# EAGLE board Zio Qwiic Eink Display 2.9 (EAGLE 9.1.0)
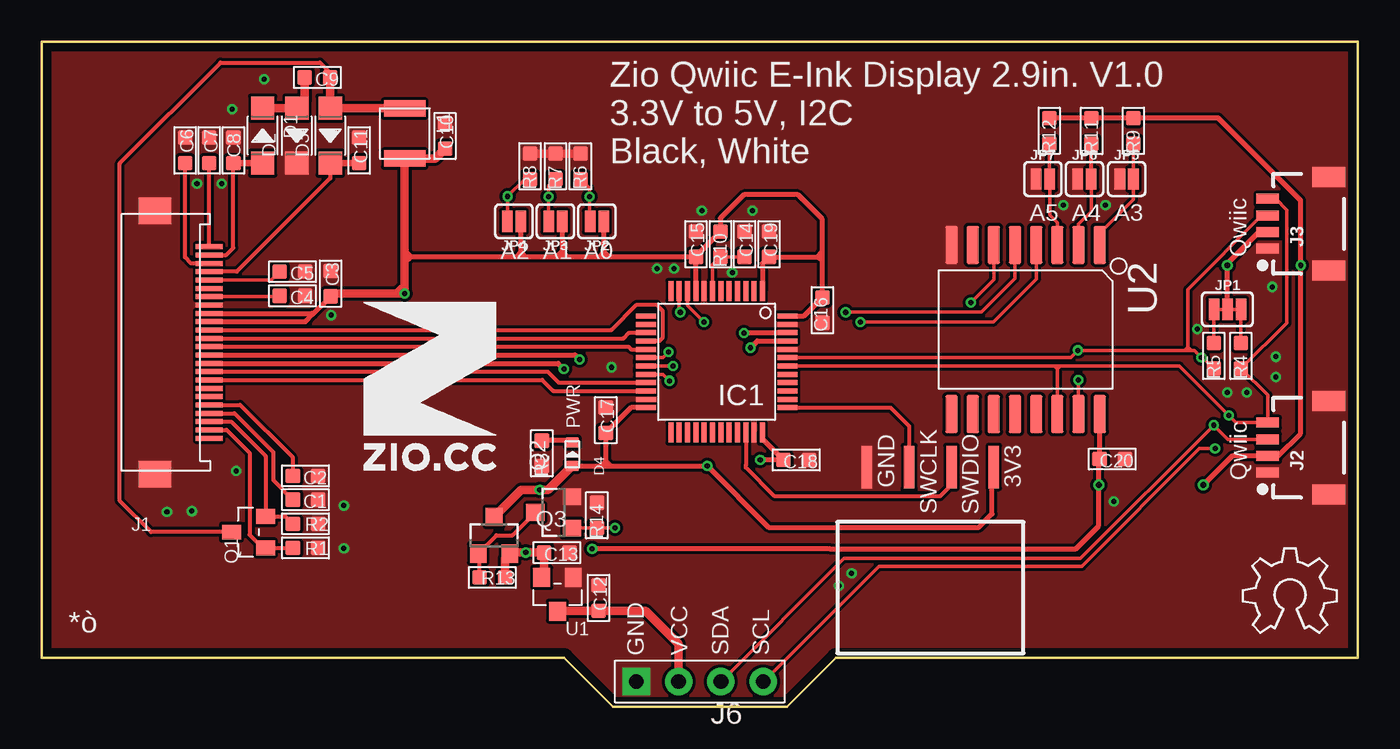
[diagram p0: board, top side]
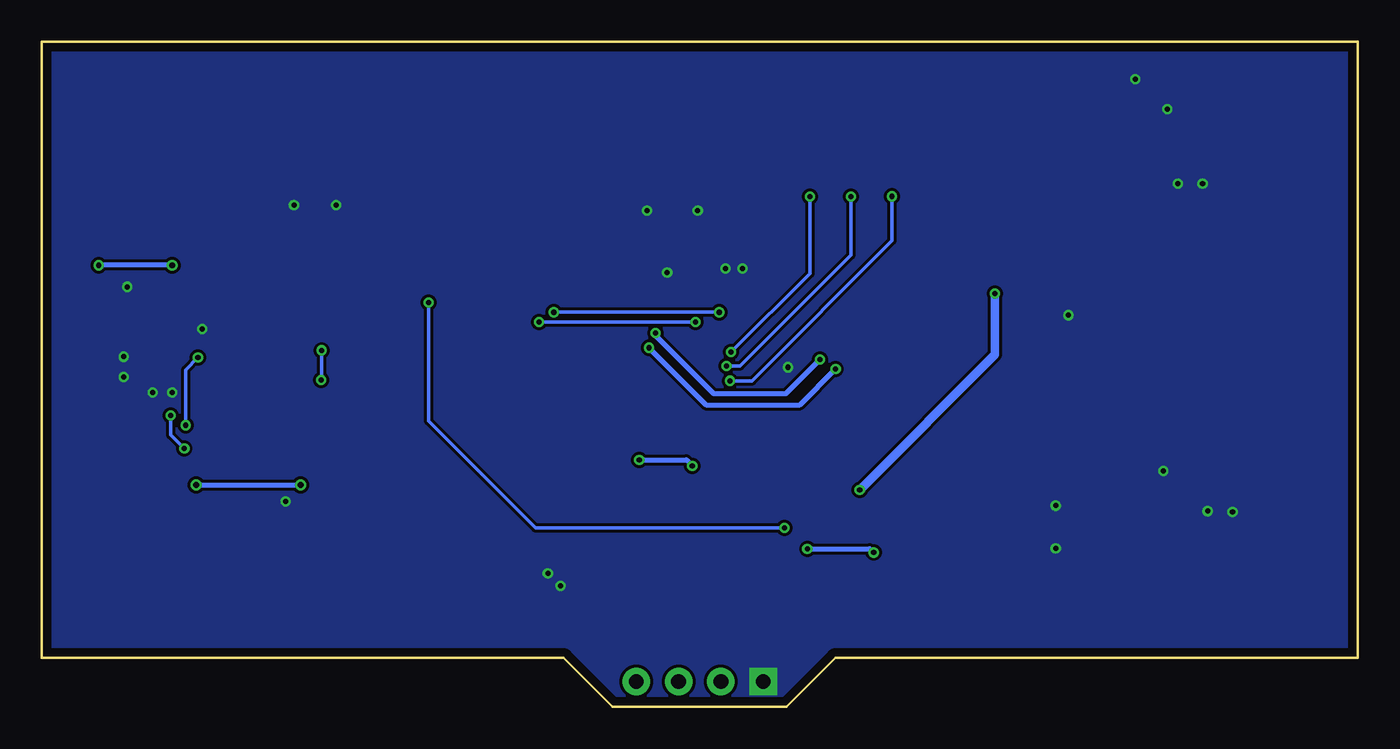
[diagram p1: board, bottom side, seen from below]

Size 79 x 39.95 mm. Coordinates in mm from the lower left corner, seen from the top.
Outline: 0,2.95 31.37,2.95 34.29,0 44.74,0 47.68,2.95 79,2.95 79,39.95 0,39.95 0,2.95
Copper layers (1*16): Top 0.035mm / dielectric 1.5mm / Bottom 0.035mm
Design rules "NOA Eagle Rule": minimum track width 7mil, minimum drill 12mil, track to track 7mil, track to pad 7mil, pad to pad 7mil, via to via 7mil, smd to smd 0mil, copper to edge 20mil, drill to drill 10mil, minimum pad ring 10mil, minimum via ring 6mil, stop-mask expansion 2mil, vias tented up to drill 25mil, thermal gap 10mil

## Footprints (pad centres in the part's own frame; a part is rotated, then mirrored left to right if it is on the bottom)
C0603 = smd 0.889 x 0.889: 1 -0.762,0; 2 0.762,0
0603 = smd 0.889 x 0.889: 1 -0.762,0; 2 0.762,0
SOD123 = smd 1.397 x 1.397: + 1.651,0; - -1.651,0
LED-0603 = smd 0.635 x 0.8: + 0.699,0; - -0.699,0
LQFP48 = smd 0.3 x 1.2: 1 -2.75,-4.25; 2 -2.25,-4.25; 3 -1.75,-4.25; 4 -1.25,-4.25; 5 -0.75,-4.25; 6 -0.25,-4.25; 7 0.25,-4.25; 8 0.75,-4.25; 9 1.25,-4.25; 10 1.75,-4.25; 11 2.25,-4.25; 12 2.75,-4.25; 25 2.75,4.25; 26 2.25,4.25; 27 1.75,4.25; 28 1.25,4.25; 29 0.75,4.25; 30 0.25,4.25; 31 -0.25,4.25; 32 -0.75,4.25; 33 -1.25,4.25; 34 -1.75,4.25; 35 -2.25,4.25; 36 -2.75,4.25 | smd 1.2 x 0.3: 13 4.25,-2.75; 14 4.25,-2.25; 15 4.25,-1.75; 16 4.25,-1.25; 17 4.25,-0.75; 18 4.25,-0.25; 19 4.25,0.25; 20 4.25,0.75; 21 4.25,1.25; 22 4.25,1.75; 23 4.25,2.25; 24 4.25,2.75; 37 -4.25,2.75; 38 -4.25,2.25; 39 -4.25,1.75; 40 -4.25,1.25; 41 -4.25,0.75; 42 -4.25,0.25; 43 -4.25,-0.25; 44 -4.25,-0.75; 45 -4.25,-1.25; 46 -4.25,-1.75; 47 -4.25,-2.25; 48 -4.25,-2.75
FPC-0.5-24P_UP = smd 0.3 x 1.6: 1 -5.75,-0.05; 2 -5.25,-0.05; 3 -4.75,-0.05; 4 -4.25,-0.05; 5 -3.75,-0.05; 6 -3.25,-0.05; 7 -2.75,-0.05; 8 -2.25,-0.05; 9 -1.75,-0.05; 10 -1.25,-0.05; 11 -0.75,-0.05; 12 -0.25,-0.05; 13 0.25,-0.05; 14 0.75,-0.05; 15 1.25,-0.05; 16 1.75,-0.05; 17 2.25,-0.05; 18 2.75,-0.05; 19 3.25,-0.05; 20 3.75,-0.05; 21 4.25,-0.05; 22 4.75,-0.05; 23 5.25,-0.05; 24 5.75,-0.05 | smd 1.6 x 1.95: 25 7.9,3.2; 26 -7.9,3.2
JST-SH-4P = smd 0.6 x 1.35: 1 1.5,0; 2 0.5,0; 3 -0.5,0; 4 -1.5,0 | smd 1.2 x 2: NC1 -2.8,3.675; NC2 2.8,3.675
4P-2.54-SMD-180 = smd 2.54 x 0.635: 1 0,3.86; 2 0,1.32; 3 0,-1.22; 4 0,-3.76
4P-65/35MIL = drill 0.889 pad 1.651 square: 1 0,3.81 | drill 0.889 pad 1.651: 2 0,1.27; 3 0,-1.27; 4 0,-3.81
SMT-JUMPER_3_2-NC_TRACE = smd 0.635 x 1.27: 1 -0.813,0; 2 0,0; 3 0.813,0
SMT-JUMPER_2_NC_PASTE_SILK_NOCREM = smd 0.635 x 1.27: 1 -0.406,0; 2 0.406,0
L3012 = smd 1 x 2.5: 1 -1.5,0; 2 1.5,0
SOT23 = smd 0.889 x 1.143: 1 -0.95,-1.016; 2 0.95,-1.016; 3 0,1.016
SOT23' = smd 1 x 1.1: 1 -0.95,-1.1; 2 0.95,-1.1; 3 0,1.1
R0603 = smd 0.889 x 0.889: 1 -0.762,0; 2 0.762,0
SOT23'' = smd 1.143 x 1.016: 1 1.016,-0.95; 2 1.016,0.95; 3 -1.016,0
SO16-W = smd 0.762 x 2.286: 1 -4.445,-5.08; 2 -3.175,-5.08; 3 -1.905,-5.08; 4 -0.635,-5.08; 5 0.635,-5.08; 6 1.905,-5.08; 7 3.175,-5.08; 8 4.445,-5.08; 9 4.445,5.08; 10 3.175,5.08; 11 1.905,5.08; 12 0.635,5.08; 13 -0.635,5.08; 14 -1.905,5.08; 15 -3.175,5.08; 16 -4.445,5.08

## Placement (x,y rotation side)
C1  1uF ±10% 25V  [C0603]  15.84,12.44 180 top
C2  1uF ±10% 25V  [C0603]  15.84,13.87 180 top
C3  1uF ±10% 10V  [C0603]  17.35,25.42 270 top
C4  1uF ±10% 25V  [C0603]  15.05,24.69 180 top
C5  1uF ±10% 25V  [C0603]  15.05,26.14 180 top
C6  1uF ±10% 25V  [C0603]  8.61,33.42 270 top
C7  1uF ±10% 25V  [C0603]  10.06,33.42 270 top
C8  1uF ±10% 50V  [0603]  11.51,33.42 270 top
C9  1uF ±10% 50V  [C0603]  16.55,37.79 180 top
C10  4.7uF ±10% 6.3V  [C0603]  24.21,34.28 270 top
C11  1uF ±10% 50V  [C0603]  19.05,33.42 270 top
C12  1uF ±10% 10V  [C0603]  33.43,6.54 270 top
C13  1uF ±10% 6.3V  [C0603]  30.93,9.27 180 top
C14  1uF ±10% 6.3V  [C0603]  42.19,27.79 270 top
C15  4.7uF ±10% 6.3V  [C0603]  39.27,27.79 270 top
C16  1uF ±10% 6.3V  [C0603]  46.86,23.83 90 top
C17  100nF ±10% 50V  [C0603]  33.86,17.22 270 top
C18  100nF ±10% 50V  [C0603]  45.29,14.83 180 top
C19  100nF ±10% 50V  [C0603]  43.66,27.79 270 top
C20  100nF ±10% 50V  [C0603]  64.26,14.88 180 top
D1  MBR0530  [SOD123]  13.26,34.31 270 top
D2  MBR0530  [SOD123]  15.31,34.3 90 top
D3  MBR0530  [SOD123]  17.32,34.3 90 top
D4  RLED  [LED-0603]  31.85,15.18 270 top
IC1  STM32F103C8T  [LQFP48]  40.51,20.73 180 top
J1  FPC-0.5-24P-UP  [FPC-0.5-24P_UP]  10,21.89 90 top
J2  JST-SH-4P-1.0  [JST-SH-4P]  73.58,15.57 270 top
J3  JST-SH-4P-1.0  [JST-SH-4P]  73.58,29.01 270 top
J4  [4P-2.54-SMD-180]  53.29,14.4 270 top
J6  [4P-65/35MIL]  39.5,1.52 90 top
JP1  SMT-JUMPER_3_2-NC_TRACE  [SMT-JUMPER_3_2-NC_TRACE]  71.17,23.88 0 top
JP2  JUMPER-SMT_2_NC_PASTE_NOCREM  [SMT-JUMPER_2_NC_PASTE_SILK_NOCREM]  33.32,29.16 180 top
JP3  JUMPER-SMT_2_NC_PASTE_NOCREM  [SMT-JUMPER_2_NC_PASTE_SILK_NOCREM]  30.84,29.16 180 top
JP4  JUMPER-SMT_2_NC_PASTE_NOCREM  [SMT-JUMPER_2_NC_PASTE_SILK_NOCREM]  28.35,29.16 180 top
JP5  JUMPER-SMT_2_NC_PASTE_NOCREM  [SMT-JUMPER_2_NC_PASTE_SILK_NOCREM]  65.12,31.7 0 top
JP6  JUMPER-SMT_2_NC_PASTE_NOCREM  [SMT-JUMPER_2_NC_PASTE_SILK_NOCREM]  62.6,31.7 0 top
JP7  JUMPER-SMT_2_NC_PASTE_NOCREM  [SMT-JUMPER_2_NC_PASTE_SILK_NOCREM]  60.1,31.7 0 top
L1  68uH 1A  [L3012]  21.79,34.43 90 top
Q1  2N7002  [SOT23]  12.42,10.5 90 top
Q2  2N7002  [SOT23']  30.73,11.68 90 top
Q3  CJ2301  [SOT23']  27.15,10.31 0 top
R1  10K ±1%  [R0603]  15.84,9.55 180 top
R2  3R ±1%  [R0603]  15.84,11 180 top
R3  1K ±1%  [R0603]  30.02,15.22 90 top
R4  4.7K ±1%  [R0603]  71.98,21.08 90 top
R5  4.7K ±1%  [R0603]  70.36,21.08 90 top
R6  10K ±1%  [R0603]  32.33,32.46 90 top
R7  10K ±1%  [R0603]  30.84,32.46 90 top
R8  10K ±1%  [R0603]  29.31,32.46 90 top
R9  10K ±1%  [R0603]  65.53,34.59 90 top
R10  10K ±1%  [R0603]  40.74,27.79 90 top
R11  10K ±1%  [R0603]  63.02,34.58 90 top
R12  10K ±1%  [R0603]  60.48,34.59 90 top
R13  100K ±1%  [R0603]  27.05,7.77 180 top
R14  100K ±1%  [R0603]  33.32,11.51 90 top
U1  XC6206P332MR  [SOT23'']  30.96,6.77 90 top
U2  PCF8574T  [SO16-W]  59.06,22.66 180 top
U$10  [OSHW_6X200_NOTEXT]  72.09,4.45 0 top
U$20  [10MM]  19.3,14.22 0 top

## Library data of the parts
C1-C7 C9-C20 L1 R1-R14 = RCL
C8 Q1 = Discretex
D1-D4 Q2 Q3 = Discrete_NOA
IC1 = micro-stm_v3
J1-J4 = Connector
J6 = Connector_NOA
JP1-JP7 = NOA-Jumpers
U1 = IC_NOA
U2 = IC
U$10 = Logo_OSHW
U$20 = ZIO_silkscreen_package

## Nets
+3V3: C3.2 C10.2 C15.2 C16.2 C17.2 C18.2 C19.2 D4.+ IC1.1 IC1.9 IC1.24 IC1.36 IC1.48 J1.15 J1.16 J4.1 JP2.1 JP3.1 JP4.1 L1.1 Q3.3 R10.2
+VDD: C4.2 J1.18
A0: IC1.18 JP2.2 R6.1
A1: IC1.19 JP3.2 R7.1
A2: IC1.20 JP4.2 R8.1
A3: JP5.2 R9.1 U2.1
A4: JP6.2 R11.1 U2.2
A5: JP7.2 R12.1 U2.3
BS: IC1.22 J1.8
BUSY: IC1.21 J1.9
CS: IC1.17 J1.12
D/C: IC1.46 J1.11
GDR: J1.2 Q1.1 R1.2
GND: C1.1 C2.1 C3.1 C4.1 C5.1 C6.1 C7.1 C8.1 C10.1 C11.1 C12.1 C13.1 C14.1 C15.1 C16.1 C17.1 C18.1 C19.1 C20.1 D2.- IC1.8 IC1.23 IC1.35 IC1.44 IC1.47 J1.17 J1.25 J1.26 J2.1 J2.NC1 J2.NC2 J3.1 J3.NC1 J3.NC2 J4.4 J6.1 JP5.1 JP6.1 JP7.1 Q2.2 R1.1 R2.1 R3.1 R6.2 R7.2 R8.2 R14.2 U1.1 U2.8
MOSI: IC1.16 J1.14
N$1: IC1.31
N$2: C9.2 D1.- D2.+
N$3: C9.1 D3.+ L1.2 Q1.3
N$4: IC1.30
N$5: C14.2 IC1.7 R10.1
N$6: JP1.3 R4.2
N$7: D4.- R3.2
N$8: JP1.1 R5.2
N$9: Q2.3 Q3.1 R13.2
NC: J1.1
P0: IC1.10 U2.4
P1: IC1.11 U2.5
P2: Q2.1 R14.1 U2.6
PREVGH: C11.2 D3.- J1.21
PREVGL: C8.2 D1.+ J1.23
RES: IC1.45 J1.10
RESE: J1.3 Q1.2 R2.2
SCK: IC1.15 J1.13
SCL: IC1.42 J2.4 J3.4 J6.4 R4.1 U2.14
SDA: IC1.43 J2.3 J3.3 J6.3 R5.1 U2.15
SWCLK: IC1.37 J4.3
SWDIO: IC1.34 J4.2
TSCL: J1.6
TSDA: J1.7
VCC: C12.2 J6.2 U1.3
VCOM: C7.2 J1.24
VDD: C13.2 C20.2 J2.2 J3.2 JP1.2 Q3.2 R9.2 R11.2 R12.2 R13.1 U1.2 U2.16
VGH: C2.2 J1.5
VGL: C1.2 J1.4
VPP: J1.19
VSH: C5.2 J1.20
VSL: C6.2 J1.22

## Tracks (layer width: path | path; a pad name or v marks a point on that pad's centre or on a via)
+3V3  (via drill 0.3)
  Top 0.305: J1.16 16.22,23.64 16.27,23.58 | J1.15 15.83,23.14 16.27,23.58 | 16.27,23.58 C3.2 | IC1.24 35.38,17.98 C17.2 33.86,14.76 | IC1.9 39.27,26.87 C15.2 34.06,27.03 | IC1.48 45.75,23.48 C16.2 46.86,26.8 | IC1.36 43.26,16.1 C18.2 v43.13,14.83 | 39.27,27.08 R10.2 40.74,29.34 42.16,30.76 45.39,30.76 46.86,29.29 46.86,27.33 | IC1.1 43.26,26.63 C19.2 46.56,27.03 | 34.06,27.03 33.45,27.03 | 33.45,27.03 31.57,27.03 | 31.57,27.03 30.91,27.03 | JP3.1 31.24,27.36 | 31.24,27.36 31.57,27.03 | 31.24,27.36 30.91,27.03 | JP2.1 33.73,27.36 | 33.73,27.36 34.06,27.03 | 33.73,27.36 33.73,27.3 33.45,27.03 | 46.86,26.8 46.86,27.33 | 46.56,27.03 46.86,27.33 | 46.56,27.03 46.63,27.03 46.86,26.8 | 30.91,27.03 29.03,27.03 | 29.03,27.03 28.47,27.03 | 28.47,27.03 22.17,27.03 | 22.17,27.03 21.79,27.41 | 22.17,27.03 21.78,26.64 21.78,26.57 | 28.75,27.3 29.03,27.03 | JP4.1 28.75,27.3 | 28.75,27.3 28.47,27.03 | 33.63,14.48 D4.+ 31.55,14.17 | 33.63,14.48 34.14,14.48 | 34.14,14.48 v39.95,14.48 43.64,10.79 56.26,10.79 57.05,11.58 57.05,14.3 J4.1 | 33.86,14.76 34.14,14.48 | 33.86,14.76 33.63,14.53 33.63,14.48
  Top 0.508: C10.2 23.61,32.92 L1.1 21.79,27.41 21.78,26.57 21.78,26.09 | 21.78,25.15 v21.78,24.82 21.34,24.82 | 21.78,25.15 21.78,25.63 | 21.78,25.63 21.78,26.09 | C3.2 17.51,24.82 21.34,24.82 | 39.27,27.08 39.27,26.87 | 21.34,24.82 21.67,25.15 21.78,25.15 | Q3.3 28.77,13.03 v29.9,13.03 30.41,13.03 31.55,14.17 31.83,14.46 | 21.78,25.63 21.78,26.09
  Bottom 0.305: v43.13,14.83 40.3,14.83 v39.95,14.48
  Bottom 0.508: v21.78,24.82 21.78,21.15 v29.9,13.03
+VDD
  Top 0.203: C4.2 14.24,24.64 J1.18
A0  (via drill 0.3)
  Top 0.203: v37.62,21.31 37.28,20.98 IC1.18 | R6.1 32.89,31.14 v32.89,30.63 32.89,29.18 JP2.2
  Bottom 0.203: v37.62,21.31 32.89,26.04 v32.89,30.63
A1  (via drill 0.3)
  Top 0.203: v37.89,20.48 v37.9,20.47 v37.89,20.48 | R7.1 30.43,31.29 v30.43,30.63 JP3.2 | v37.89,20.48 IC1.19
  Bottom 0.203: v37.9,20.47 37.08,20.47 30.43,27.13 v30.43,30.63
A2  (via drill 0.3)
  Top 0.203: v37.69,19.58 37.3,19.98 IC1.20 | JP4.2 27.96,29.18 v27.96,30.66 29.01,31.7 R8.1
  Bottom 0.203: v37.69,19.58 36.37,19.58 27.96,27.99 v27.96,30.66
A3
  Top 0.203: R9.1 JP5.2 65.53,30.48 63.5,28.45 U2.1
A4
  Top 0.203: 63,33.81 R11.1 | JP6.2 63,29.75 62.23,28.98 U2.2
  Top 0.254: JP6.2 63,33.81
A5
  Top 0.203: R12.1 60.48,31.72 JP7.2 60.5,29.54 60.96,29.08 U2.3
BS
  Top 0.254: IC1.22 30.71,18.98 30.05,19.64 J1.8
BUSY
  Top 0.254: IC1.21 31.04,19.48 30.38,20.14 J1.9
CS
  Top 0.254: IC1.17 35.38,21.48 35.22,21.64 J1.12
D/C  (via drill 0.3)
  Top 0.305: J1.11 32,21.14 v32.28,20.85 | v42.16,22.45 42.19,22.48 IC1.46
  Bottom 0.305: v32.28,20.85 34.34,18.8 38.66,18.8 42.16,22.3 v42.16,22.45
GDR
  Top 0.254: J1.2 11.1,16.64 12.47,15.26 12.47,10.34 13.26,9.55 Q1.1 R1.2 | R1.2
GND  (via drill 0.3)
  Top 0.508: R8.2 R7.2 R6.2
  other vias: 10.79,31.42 11.43,35.89 9.32,31.42 9.02,11.76 11.68,14.17 13.36,37.69 7.52,11.71 18.14,12.09 18.14,9.53 73.86,25.22 34.21,20.4 69.37,22.68 74.07,21.03 74.07,19.81 71.17,18.87 72.34,18.87 42.67,29.79 39.62,29.79 41.45,26.09 17.37,23.52 37.95,26.31 36.93,26.31 61.32,30.12 63.86,30.12 64.36,12.34 48.62,8.03 47.85,7.26
  pour Bottom (no thermals): 0,0 0,39.95 78.97,39.95 78.97,0
  pour Top (no thermals): 0,0 78.97,0 78.97,39.95 0,39.95
MOSI
  Top 0.254: IC1.16 37.09,21.98 37.26,22.15 37.26,23.8 36.91,24.16 35.71,24.16 34.19,22.64 J1.14
N$2
  Top 0.508: D1.- D2.+ 15.79,36.42 C9.2
N$3
  Top 0.254: 17.32,37.78 17.32,38.08 16.71,38.68 10.74,38.68 4.7,32.64 4.7,12.37 6.57,10.5 Q1.3
  Top 0.508: C9.1 17.32,37.78 D3.+ 21.49,35.95 L1.2
N$5
  Top 0.203: IC1.7 40.26,26.55 R10.1 C14.2
N$6
  Top 0.203: JP1.3 R4.2
N$7
  Top 0.305: D4.- 31.74,15.99 R3.2
N$8
  Top 0.203: JP1.1 R5.2
N$9
  Top 0.254: R13.2 26.29,9.13 Q3.1 27.3,10.31 28.26,10.31 Q2.3
P0  (via drill 0.3)
  Top 0.203: U2.4 59.69,25.68 57.13,23.11 v49.15,23.11 | IC1.10 38.76,24.1 v39.75,23.11
  Bottom 0.203: v39.75,23.11 v49.15,23.11
P1  (via drill 0.3)
  Top 0.203: U2.5 58.42,25.71 56.41,23.7 v48.26,23.7 | IC1.11 38.26,23.76 v38.33,23.7
  Bottom 0.203: v38.33,23.7 v48.26,23.7
P2  (via drill 0.3)
  Top 0.203: U2.6 57.15,25.66 v55.78,24.28 | v34.42,10.74 R14.1 31.84,10.74 Q2.1
  Bottom 0.203: v55.78,24.28 55.78,17.17 49.35,10.74 v34.42,10.74
PREVGH
  Top 0.254: C11.2 | J1.21 11.71,26.14 17.32,31.75 D3.-
  Top 0.381: D3.- C11.2
PREVGL
  Top 0.254: J1.23 11.08,27.14 11.51,27.56 C8.2
  Top 0.381: C8.2 D1.+
RES  (via drill 0.3)
  Top 0.305: J1.10 31,20.64 v31.34,20.3 | v42.55,21.57 42.96,21.98 IC1.45
  Bottom 0.305: v31.34,20.3 33.53,18.11 39.09,18.11 v42.55,21.57
RESE
  Top 0.254: J1.3 11.36,17.14 13.44,15.06 Q1.2 14.62,11.45 R2.2
SCK
  Top 0.254: IC1.15 35.26,22.48 34.91,22.14 J1.13
SCL  (via drill 0.3)
  Top 0.203: IC1.42 60.78,20.48 | 60.78,20.48 61.14,20.48 | 61.14,20.48 68.1,20.48 | 68.1,20.48 68.27,20.48 | J3.4 74.06,30.51 74.73,29.84 74.73,23.06 R4.1 73.58,18.72 J2.4 71.68,17.07 v71.25,17.5 68.27,20.48 | v70.43,15.52 69.5,15.52 62.44,8.46 50.24,8.46 J6.4 | 68.27,20.48 68.1,20.48 | U2.14 60.96,20.3 | 60.96,20.3 61.14,20.48 | 60.96,20.3 60.79,20.48 60.78,20.48
  Bottom 0.203: v70.43,15.52 71.25,16.33 v71.25,17.5
SDA  (via drill 0.3)
  Top 0.203: R5.1 69.7,20.98 v69.62,20.98 69.19,21.41 68.96,21.41 | 68.78,21.61 68.78,25.08 73.21,29.51 J3.3 | J2.3 71.2,16.07 v70.36,16.92 62.36,8.91 48.16,8.91 J6.3 | IC1.43 61.77,20.98 v62.2,21.41 68.58,21.41 | v62.23,19.63 U2.15 | 68.58,21.41 68.78,21.61 | 68.96,21.41 68.58,21.41 | 68.78,21.61 68.96,21.44 68.96,21.41
  Bottom 0.203: v70.36,16.92 70.36,20.24 v69.62,20.98 | v62.2,21.41 62.2,19.66 v62.23,19.63
SWCLK
  Top 0.254: IC1.37 50.96,17.98 52.07,16.87 J4.3
SWDIO
  Top 0.254: IC1.34 42.26,14.5 42.26,14.38 43.99,12.65 53.92,12.65 54.61,13.33 J4.2
VCC
  Top 0.508: 31,5.78 C12.2 35.36,5.78 36.23,5.78 38.23,3.78 J6.2
  Top 0.813: U1.3 31,5.78
VCOM
  Top 0.254: C7.2 J1.24
VDD  (via drill 0.3, 0.35)
  Top 0.305: J3.2 73.06,28.51 71.17,26.62 v71.17,26.52 JP1.2 | v69.72,13.34 71.46,15.07 J2.2 74.2,15.07 75.56,16.43 v75.56,26.52 75.56,30.4 70.61,35.36 R9.2 R11.2 60.49,35.35 R12.2 | v33.05,9.5 47.3,9.5 62.08,9.5 63.45,10.88 v63.45,13.34 63.45,14.81 63.5,14.86 63.5,15.16 | 63.5,15.16 U2.16 | C20.2 63.5,15.16
  Top 0.508: 30.16,7.94 U1.2 30.16,7.94 | 28.16,9.27 v29.06,9.27 C13.2 30.16,7.94 | 28.16,9.27 Q3.2 | R13.1 27.81,8.92 28.16,9.27
  Bottom 0.305: v69.72,13.34 v63.45,13.34 | v33.05,9.5 29.29,9.5 v29.06,9.27 | v71.17,26.52 v75.56,26.52
VGH
  Top 0.203: 15.05,13.89 C2.2
  Top 0.254: J1.5 11.91,18.14 15.05,15 15.05,13.89
VGL
  Top 0.254: J1.4 11.57,17.64 13.92,15.29 13.92,13.6 C1.2
VSH
  Top 0.203: C5.2 13.79,25.64 J1.20
VSL
  Top 0.254: C6.2 8.61,27 8.97,26.64 J1.22

## Text on the board
tPlace: Zio Qwiic E-Ink Display 2.9in. V1.0 / 3.3V to 5V, I2C / Black, White | A5 | A4 | A3 | A2 | A1 | A0 | Qwiic | PWR | Qwiic | GND | 3V3 | SWCLK | SWDIO | *ò | GND | VCC | SDA | SCL